# Altium PCB customteensypcbv2.0.PcbDoc
Units mil, origin at the board's own origin, x right, y up, seen from the top; angles counter-clockwise.
Board outline 1850.39 x 1889.76 mil, 2 copper layers (Top Layer, Bottom Layer); 31 components, 60 nets, 195 pads, 21 vias.
Unrouted connection lines stored in the file: 38.
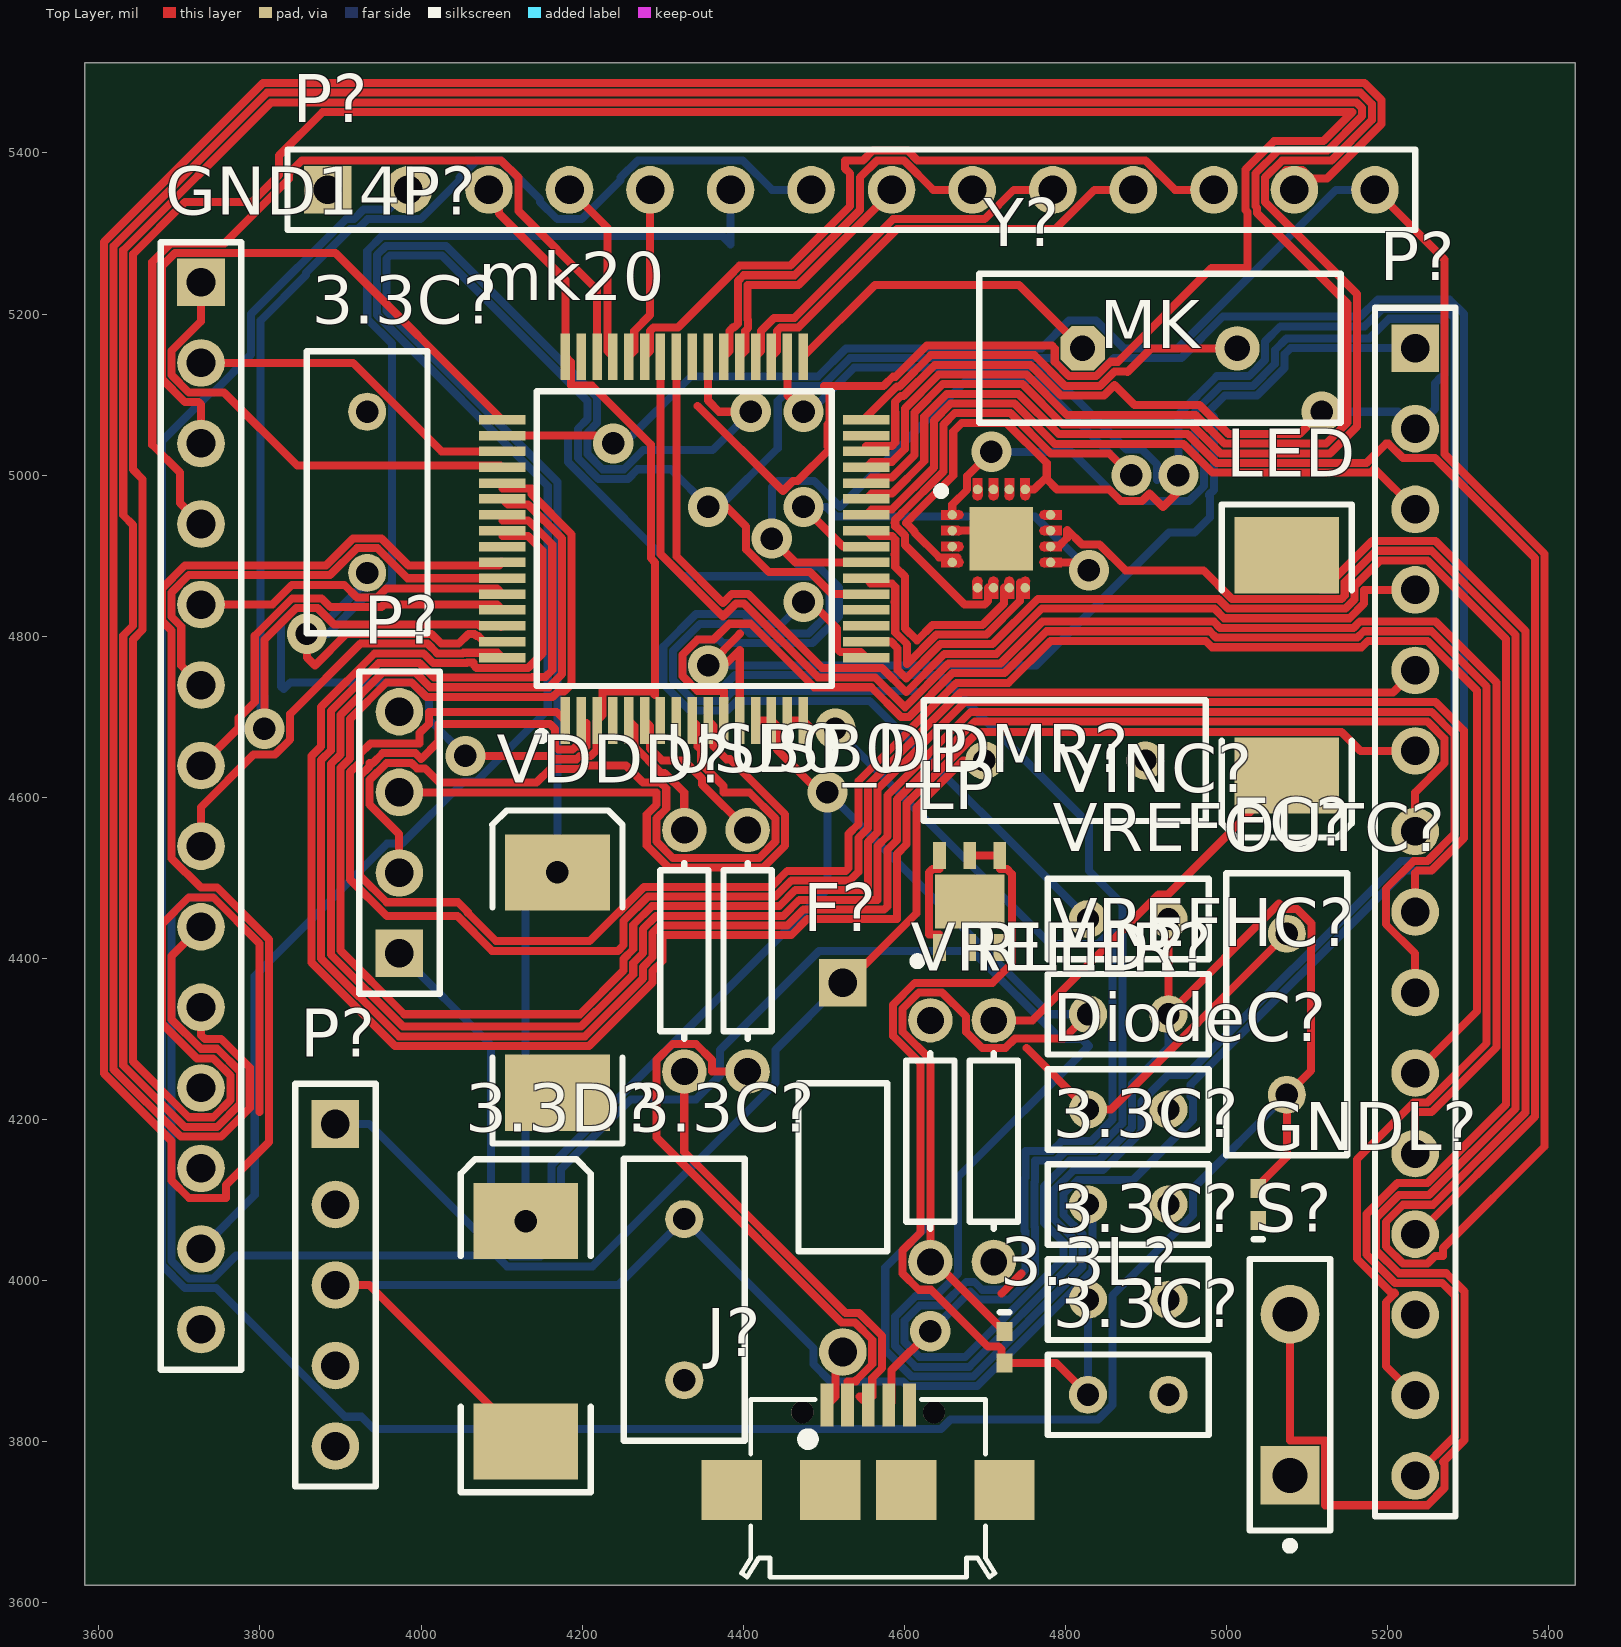
[diagram p0: Top Layer view]
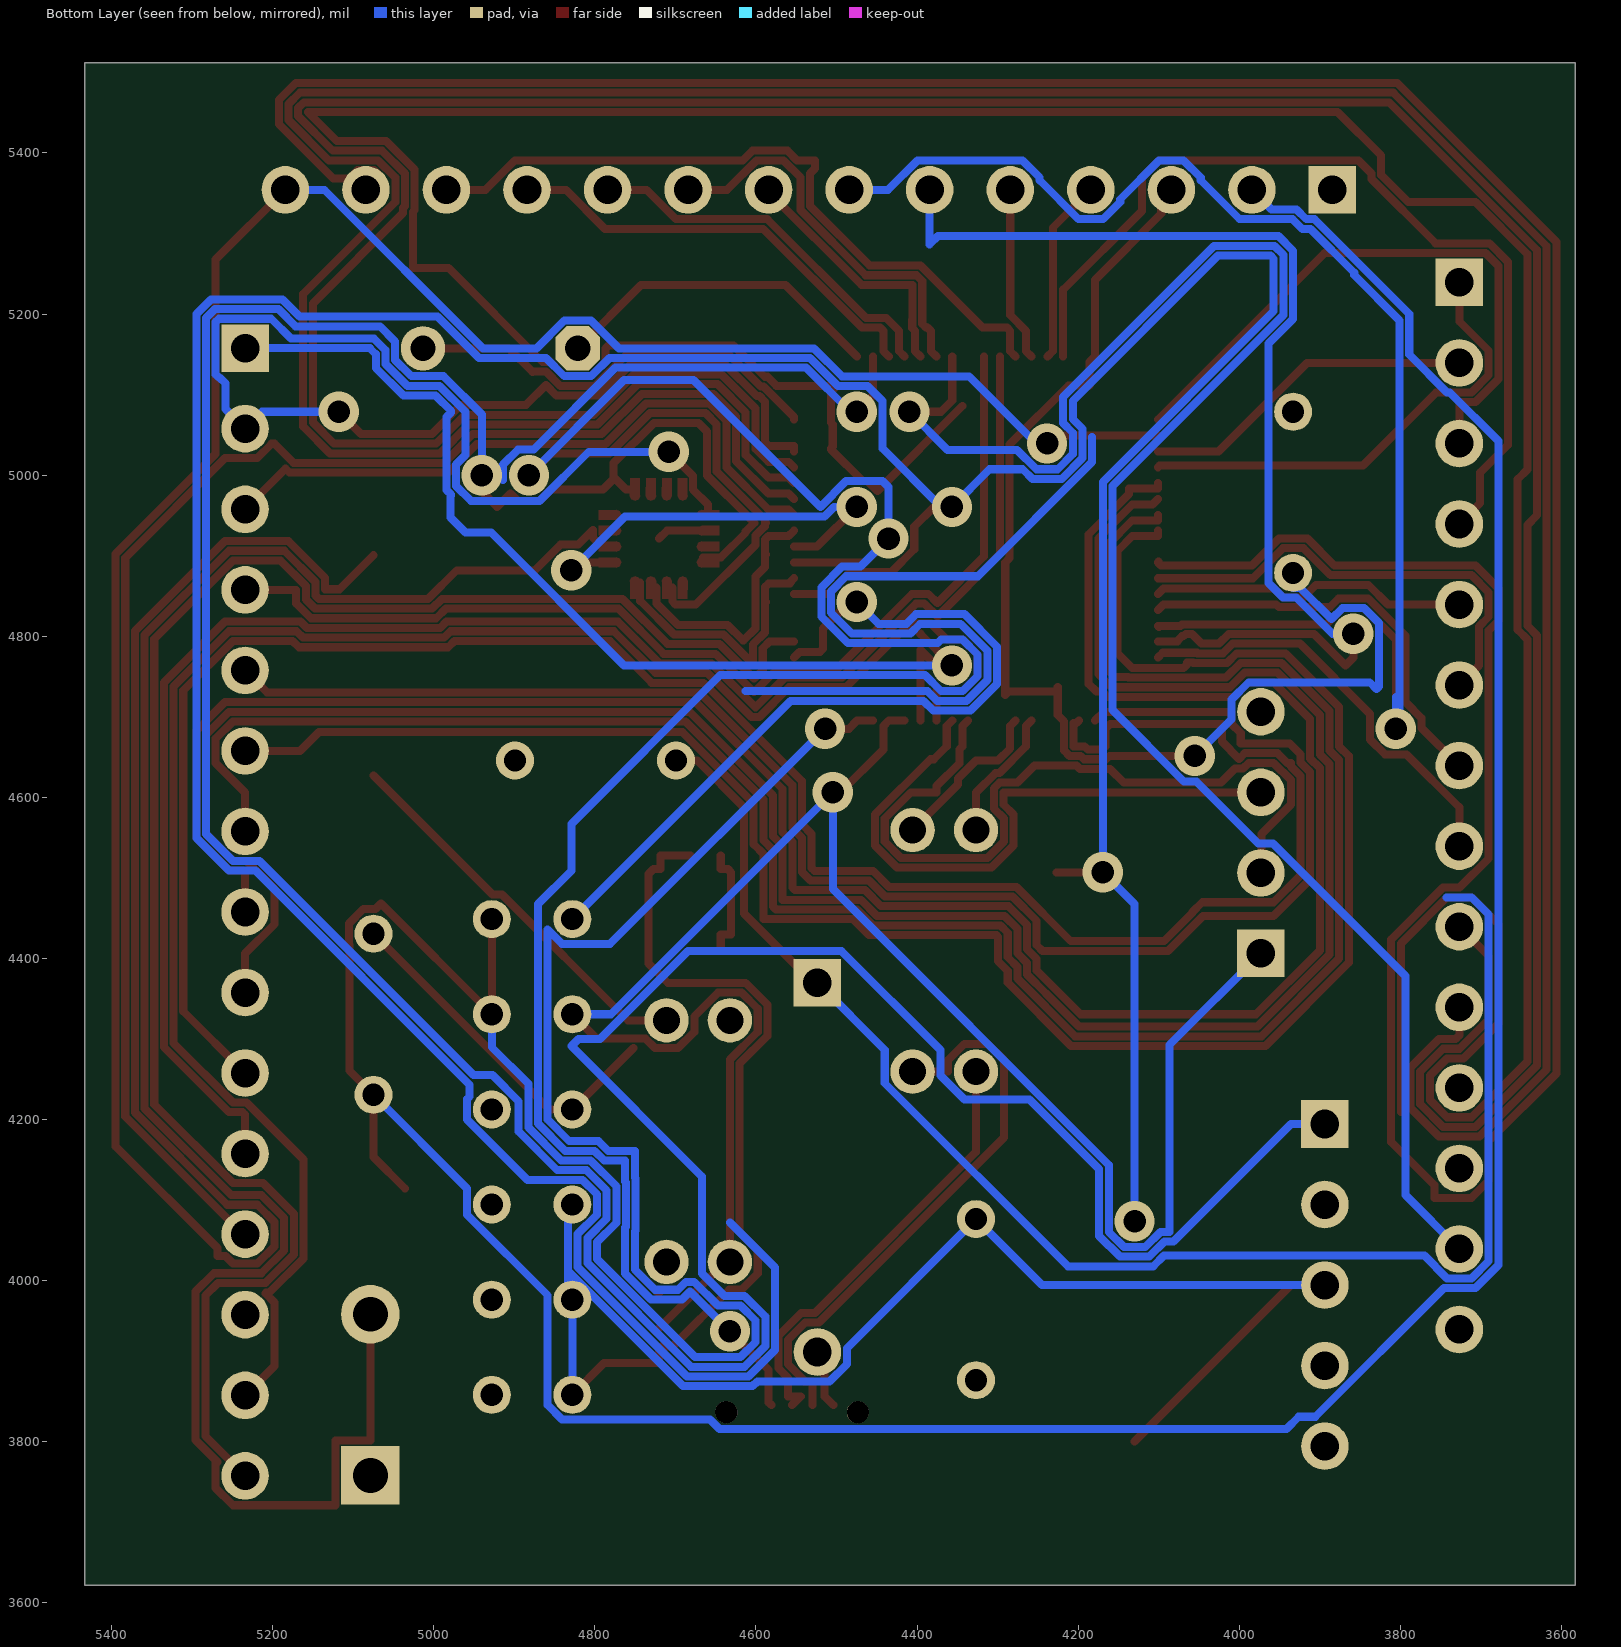
[diagram p1: Bottom Layer view, seen from below]

## Layer stack, top to bottom
Top Solder: solder mask 0.4, Solder Resist, Dk 3.5
Top Layer: signal copper 1.4
Dielectric 1: dielectric 12.6, FR-4, Dk 4.8
Bottom Layer: signal copper 1.4
Bottom Solder: solder mask 0.4, Solder Resist, Dk 3.5

## Board outline
3582.68,3622.05 3582.68,5511.81 5433.07,5511.81 5433.07,3622.05

## Design rules (kind name [scope] priority, off if disabled: settings)
Clearance [All] p1: gap=2 ignorepadtopadclearanceinfootprint=TRUE except(0: Arc-Hole Track-Hole SMDPad-Hole THPad-Hole Via-Hole Fill-Hole Poly-Hole Region-Hole Text-Hole)
PolygonConnect [All] p1: connectstyle=Relief reliefconductorwidth=10 reliefentries=4 polygonreliefangle="90 Angle" airgapwidth=10
RoomDefinition HeadersTeensy3.2 [InComponentClass('HeadersTeensy3.2')] p1: confinementstyle=ConfineIn formatcopy=TRUE lockcomponents=FALSE outline 3569.29,3622.05 5433.07,3622.05 5433.07,5511.81 3569.29,5511.81
RoutingVias [All] p1: holewidth=28 width=50 viastyle="Through Hole" minholewidth=28 minwidth=50 maxholewidth=28 maxwidth=50
SolderMaskExpansion [All] p1: expansion=4
Width [All] p1: maxlimit=10 minlimit=10 preferedwidth=10
30 further rules are at their usual default settings.

## Components (designator, comment, footprint, x,y, rotation, side; value= is the part's Value field where it differs from the comment)
3.3C? "Cap Pol1" RAD-0.2 3933.07,4978.74 r90 top value=2.2uF
3.3C? "Cap Pol1" RAD-0.1 4877.95,3976.38 r0 top value=0.1uF
3.3C? "Cap Pol1" RAD-0.1 4877.95,4094.49 r0 top value=0.1uF
3.3C? "Cap Pol1" RAD-0.2 4326.77,3976.38 r270 top value=2.2uF
3.3C? "Cap Pol1" RAD-0.1 4877.95,3858.27 r0 top value=0.1uF
3.3D? "Diode" SMC 4129.92,3937.01 r90 top
3.3L? "Ferrite Inductor" 0402-A 4724.41,3917.32 r270 top value=10mH
DiodeC? "Cap Pol1" RAD-0.1 4877.95,4212.6 r0 top value=0.1uF
F? "Fuse 2" PIN-W2/E2.8 4523.62,4140.75 r270 top
FC? "Cap Pol1" RAD-0.2 5074.8,4330.71 r270 top value=2.2uF
GND14P? "Header 14" HDR1X14 3726.77,5239.37 r270 top
GNDL? "Ferrite Inductor" 0402-A 5039.37,4094.49 r90 top value=10mH
J? "Micro-B" 629105136821 4555.12,3748.03 r0 top
LED "Diode" SMC 5074.8,4763.78 r270 top
LP "LP38691SD-ADJ" SON95P300X300X80-7N 4681.1,4470.47 r90 top
MK "MKL02Z32VFG4" QFN50P300X300X65-17N-D 4720.47,4921.26 r0 top
mk20 "mk20dx256vlh7" QFP50P1200X1200X160-64N 4326.77,4921.26 r90 top
P? "Header 15" HDR1X15 5234.24,5157.68 r270 top
P? "Header 5" HDR1X5 3893.7,4194.49 r270 top
P? "Header 14" HDR1X14 3884.25,5354.33 r0 top
P? "Header 4" HDR1X4 3973.04,4406.3 r90 top
RLED? "470" AXIAL-0.3 4711.02,4173.23 r90 top
S? "SW-PB" SPST-2 5078.74,3858.27 r90 top
USB0_DMR? "33" AXIAL-0.3 4405.51,4409.45 r90 top
USB0_DP "33" AXIAL-0.3 4326.77,4409.45 r90 top
VDDD? "Diode" SMC 4169.29,4370.08 r90 top
VINC? "Cap Pol1" RAD-0.2 4799.21,4645.67 r0 top value=2.2uF
VREFHC? "Cap Pol1" RAD-0.1 4877.95,4330.71 r0 top value=0.1uF
VREFHR? "470" AXIAL-0.3 4632.28,4173.23 r270 top
VREFOUTC? "Cap Pol1" RAD-0.1 4877.95,4448.82 r0 top value=0.1uF
Y? "ECS-10-13-1" HC-49U 4917.32,5157.48 r0 top

## Footprints (in the part's own frame and the unit in brackets; to place one, negate y for a bottom-side part, rotate by r counter-clockwise, add the part's x,y. Pads: shape width x height; smd on the part's side, far side on the other; paste and mask are expansions set on the pad)
0402-A [mm] "Chip Inductor, Body 1.0x0.5mm, IPC High Density"
  rect 0.6x0.5 smd: 1(-0.5,0) 2(0.5,0)
  silkscreen extent -1.1,-0.15 -1.1,0.15, body extent -0.55,-0.3 0.55,0.3, height 0.55
629105136821 [mm] "Micro USB 2.0 SMT Type B Horizontal 5 Contacts"
  rect 0.4x1.35 smd: 1(-1.3,2.475) 2(-0.65,2.475) 3(0,2.475) 4(0.65,2.475) 5(1.3,2.475)
  rect 1.9x1.9 smd: Shell(-4.3,-0.2) Shell(-1.2,-0.2) Shell(1.2,-0.2) Shell(4.3,-0.2)
  round 0.7 hole 0.7 unplated: ""(-2.075,2.25) ""(2.075,2.25)
  silkscreen extent -4,-2.95 4,2.65, body extent -4,-2.95 4,2.97, height 2.75
AXIAL-0.3 [mm] "Axial Device, Thru-Hole; 2 Leads; 0.3 in Pin Spacing"
  round 1.4 hole 0.85: 1(-3.81,0) 2(3.81,0)
  silkscreen extent -2.77,-0.76 2.77,0.76
HC-49U [mm] "Quartz Crystal, Thru-Hole; 2 Leads; Body 11.35 x 4.65 x 13.46 mm (LxWxH max)"
  oct 1.4x1.4 hole 0.8: 1(-2.44,0)
  round 1.4 hole 0.8: 2(2.44,0)
  silkscreen extent -5.7,-2.35 5.7,2.35
HDR1X4 [mm] "Connector; Header; 4 Position"
  rect 1.5x1.5 hole 0.9: 1(0,0)
  round 1.5 hole 0.9: 2(2.54,0) 3(5.08,0) 4(7.62,0)
  silkscreen extent -1.27,-1.27 8.89,1.27
HDR1X5 [mm] "Connector; Header; 5 Position"
  rect 1.5x1.5 hole 0.9: 1(0,0)
  round 1.5 hole 0.9: 2(2.54,0) 3(5.08,0) 4(7.62,0) 5(10.16,0)
  silkscreen extent -1.27,-1.27 11.43,1.27
HDR1X14 [mm] "Connector; Header; 14 Position"
  rect 1.5x1.5 hole 0.9: 1(0,0)
  round 1.5 hole 0.9: 2(2.54,0) 3(5.08,0) 4(7.62,0) 5(10.16,0) 6(12.7,0) 7(15.24,0) 8(17.78,0) 9(20.32,0) 10(22.86,0) 11(25.4,0) 12(27.94,0) 13(30.48,0) 14(33.02,0)
  silkscreen extent -1.27,-1.27 34.29,1.27
HDR1X15 [mm] "Connector; Header; 15 Position"
  rect 1.5x1.5 hole 0.9: 1(0,0)
  round 1.5 hole 0.9: 2(2.54,0) 3(5.08,0) 4(7.62,0) 5(10.16,0) 6(12.7,0) 7(15.24,0) 8(17.78,0) 9(20.32,0) 10(22.86,0) 11(25.4,0) 12(27.94,0) 13(30.48,0) 14(33.02,0) 15(35.56,0)
  silkscreen extent -1.27,-1.27 36.83,1.27
PIN-W2/E2.8 [mm] "Thru-Hole; 2 Leads"
  rect 1.5x1.5 hole 0.9: 1(-5.825,0)
  round 1.5 hole 0.9: 2(5.825,0)
  silkscreen extent -2.65,-1.4 2.65,1.4
QFN50P300X300X65-17N-D [mm]
  round 0.3 smd: 1(-1.55,0.75) 2(-1.55,0.25) 3(-1.55,-0.25) 4(-1.55,-0.75) 5(-0.75,-1.55) 6(-0.25,-1.55) 7(0.25,-1.55) 8(0.75,-1.55) 9(1.55,-0.75) 10(1.55,-0.25) 11(1.55,0.25) 12(1.55,0.75) 13(0.75,1.55) 14(0.25,1.55) 15(-0.25,1.55) 16(-0.75,1.55)
  rrect0% 2x2 smd: 17(0,0)
  Top Layer region: -1.9,0.9 -1.35,0.912 -1.235,0.865 -1.188,0.75 -1.235,0.635 -1.35,0.588 -1.35,0.6 -1.9,0.6 -1.9,0.9
  Top Layer region: -1.9,0.4 -1.35,0.412 -1.235,0.365 -1.188,0.25 -1.235,0.135 -1.35,0.088 -1.35,0.1 -1.9,0.1 -1.9,0.4
  Top Layer region: -1.9,-0.1 -1.35,-0.088 -1.235,-0.135 -1.188,-0.25 -1.235,-0.365 -1.35,-0.412 -1.35,-0.4 -1.9,-0.4 -1.9,-0.1
  Top Layer region: -1.9,-0.6 -1.35,-0.588 -1.235,-0.635 -1.188,-0.75 -1.235,-0.865 -1.35,-0.912 -1.35,-0.9 -1.9,-0.9 -1.9,-0.6
  Top Layer region: -0.9,-1.9 -0.912,-1.35 -0.865,-1.235 -0.75,-1.188 -0.635,-1.235 -0.588,-1.35 -0.6,-1.35 -0.6,-1.9 -0.9,-1.9
  Top Layer region: -0.4,-1.9 -0.412,-1.35 -0.365,-1.235 -0.25,-1.188 -0.135,-1.235 -0.088,-1.35 -0.1,-1.35 -0.1,-1.9 -0.4,-1.9
  Top Layer region: 0.1,-1.9 0.088,-1.35 0.135,-1.235 0.25,-1.188 0.365,-1.235 0.412,-1.35 0.4,-1.35 0.4,-1.9 0.1,-1.9
  Top Layer region: 0.6,-1.9 0.588,-1.35 0.635,-1.235 0.75,-1.188 0.865,-1.235 0.912,-1.35 0.9,-1.35 0.9,-1.9 0.6,-1.9
  Top Layer region: 1.9,-0.9 1.35,-0.912 1.235,-0.865 1.188,-0.75 1.235,-0.635 1.35,-0.588 1.35,-0.6 1.9,-0.6 1.9,-0.9
  Top Layer region: 1.9,-0.4 1.35,-0.412 1.235,-0.365 1.188,-0.25 1.235,-0.135 1.35,-0.088 1.35,-0.1 1.9,-0.1 1.9,-0.4
  Top Layer region: 1.9,0.1 1.35,0.088 1.235,0.135 1.188,0.25 1.235,0.365 1.35,0.412 1.35,0.4 1.9,0.4 1.9,0.1
  Top Layer region: 1.9,0.6 1.35,0.588 1.235,0.635 1.188,0.75 1.235,0.865 1.35,0.912 1.35,0.9 1.9,0.9 1.9,0.6
  Top Layer region: 0.9,1.9 0.912,1.35 0.865,1.235 0.75,1.188 0.635,1.235 0.588,1.35 0.6,1.35 0.6,1.9 0.9,1.9
  Top Layer region: 0.4,1.9 0.412,1.35 0.365,1.235 0.25,1.188 0.135,1.235 0.088,1.35 0.1,1.35 0.1,1.9 0.4,1.9
  Top Layer region: -0.1,1.9 -0.088,1.35 -0.135,1.235 -0.25,1.188 -0.365,1.235 -0.412,1.35 -0.4,1.35 -0.4,1.9 -0.1,1.9
  Top Layer region: -0.6,1.9 -0.588,1.35 -0.635,1.235 -0.75,1.188 -0.865,1.235 -0.912,1.35 -0.9,1.35 -0.9,1.9 -0.6,1.9
  silkscreen extent -2.02,1.38 -1.77,1.62
QFP50P1200X1200X160-64N [mm]
  rect 1.475x0.3 smd: 1(-5.738,3.75) 2(-5.738,3.25) 3(-5.738,2.75) 4(-5.738,2.25) 5(-5.738,1.75) 6(-5.738,1.25) 7(-5.738,0.75) 8(-5.738,0.25) 9(-5.738,-0.25) 10(-5.738,-0.75) 11(-5.738,-1.25) 12(-5.738,-1.75) 13(-5.738,-2.25) 14(-5.738,-2.75) 15(-5.738,-3.25) 16(-5.738,-3.75) 33(5.738,-3.75) 34(5.738,-3.25) 35(5.738,-2.75) 36(5.738,-2.25) 37(5.738,-1.75) 38(5.738,-1.25) 39(5.738,-0.75) 40(5.738,-0.25) 41(5.738,0.25) 42(5.738,0.75) 43(5.738,1.25) 44(5.738,1.75) 45(5.738,2.25) 46(5.738,2.75) 47(5.738,3.25) 48(5.738,3.75)
  rect 0.3x1.475 smd: 17(-3.75,-5.738) 18(-3.25,-5.738) 19(-2.75,-5.738) 20(-2.25,-5.738) 21(-1.75,-5.738) 22(-1.25,-5.738) 23(-0.75,-5.738) 24(-0.25,-5.738) 25(0.25,-5.738) 26(0.75,-5.738) 27(1.25,-5.738) 28(1.75,-5.738) 29(2.25,-5.738) 30(2.75,-5.738) 31(3.25,-5.738) 32(3.75,-5.738) 49(3.75,5.738) 50(3.25,5.738) 51(2.75,5.738) 52(2.25,5.738) 53(1.75,5.738) 54(1.25,5.738) 55(0.75,5.738) 56(0.25,5.738) 57(-0.25,5.738) 58(-0.75,5.738) 59(-1.25,5.738) 60(-1.75,5.738) 61(-2.25,5.738) 62(-2.75,5.738) 63(-3.25,5.738) 64(-3.75,5.738)
  silkscreen extent -6.35,-4.65 4.65,4.65
RAD-0.1 [mm] "Radial Cap, Thru-Hole; 2 Leads; 0.1 in Pin Spacing"
  round 1.2 hole 0.7: 1(-1.27,0) 2(1.27,0)
  silkscreen extent -2.54,-1.27 2.54,1.27
RAD-0.2 [mm] "Radial Cap, Thru-Hole; 2 Leads; 0.2 in Pin Spacing"
  round 1.2 hole 0.7: 1(-2.54,0) 2(2.54,0)
  silkscreen extent -4.44,-1.91 4.44,1.91
SMC [mm] "DO-214-AB/SMC; 2 C-Bend Leads; Body 7.9 x 5.9 mm, inc. leads (LxW)"
  rect 2.4x3.3 smd: 1(-3.475,0) 2(3.475,0)
  silkscreen extent -5.07,-2.05 5.43,2.05
SON95P300X300X80-7N [mm]
  rect 0.85x0.4 smd: 1(-1.45,0.95) 2(-1.45,0) 3(-1.45,-0.95) 4(1.45,-0.95) 5(1.45,0) 6(1.45,0.95)
  rect 1.7x2.2 smd: 7(0,0)
  silkscreen extent -2,1.52 -1.75,1.77
SPST-2 [mm] "Switch; 2 Leads"
  rect 1.85x1.85 hole 1.1: 1(-2.54,0)
  round 1.85 hole 1.1: 2(2.54,0)
  silkscreen extent -4.89,-1.27 4.28,1.27

## Part data
3.3C? 3.3C? 3.3C? 3.3C? 3.3C? DiodeC? FC? VINC? VREFHC? VREFOUTC?: "Polarized Capacitor (Radial)", LatestRevisionDate=17-Jul-2002, LatestRevisionNote="Re-released for DXP Platform.", PackageDescription="Polarized Capacitor (Radial); 2 Leads", PackageReference=RB7.6-15, Published=8-Jun-2000, Publisher="Altium Limited"
3.3D? LED VDDD?: "Default Diode", Code_JEDEC=DO-214-AB, LatestRevisionDate=17-Jul-2002, LatestRevisionNote="Re-released for DXP Platform.", PackageDescription="DO-214-AB/SMC; 2 C-Bend Leads; Body 7.9 x 5.9 mm, inc. leads (LxW)", PackageReference=SMC, PackageVersion=Sep-1996, Published=8-Jun-2000, Publisher="Altium Limited"
3.3L? GNDL?: library part Inductor, "Inductor", Code_IEC=1005, Code_JEITA=0402, LatestRevisionDate=29-May-2009, LatestRevisionNote="IPC-7351 Footprint Added.", PackageDescription="Chip Inductor", PackageReference=0402-A, Published=8-Jun-2000, Publisher="Altium Limited"
F?: "Fuse", LatestRevisionDate=17-Jul-2002, LatestRevisionNote="Re-released for DXP Platform.", PackageDescription="Thru-Hole; 2 Leads", PackageReference=PIN-W2/E2.8, Published=8-Jun-2000, Publisher="Altium Limited"
GND14P? P?: "Header, 14-Pin", LatestRevisionDate=17-Jul-2002, LatestRevisionNote="Re-released for DXP Platform.", Publisher="Altium Limited"
J?: library part 629105136821, "Micro USB 2.0 SMT Type B Horizontal 5 Contacts WR-COM", ComponentLink1Description=Manufacturer, ComponentLink1URL=http://www.we-online.de, ComponentLink2Description=Datasheet, ComponentLink2URL=http://katalog.we-online.de/em/datasheet/629105136821.pdf, Construction=SMT, Gender=Receptacle, Interface Type="Type B", Part Number=629105136821, Published Date="April 2017", Publisher="Wurth Elektronik", Sub-Family="Micro USB 2.0", Type=Horizontal
LP: "500mA LDO Regulator Adj.,LP38691SD-ADJ", Manufacturer_Name="Texas Instruments", Mouser Part Number=926-LP38691SD-ADJ, Datasheet Link=http://www.ti.com/lit/ds/symlink/lp38691-adj.pdf, Geometry.Height=0.8mm, Manufacturer_Part_Number=LP38691SD-ADJ, Supplier_Name=Mouser
MK: "Freescale MKL02Z32VFG4, 32bit ARM Cortex M0 Microcontroller, 48MHz, 32 kB Flash, 16-Pin QFN", Manufacturer_Name=Nexperia, RS Part Number=7884723, Datasheet Link=http://cache.nxp.com/files/32bit/doc/data_sheet/KL02P32M48SF0.pdf, Geometry.Height=0.65mm, Manufacturer_Part_Number=MKL02Z32VFG4, Supplier_Name=RS
mk20: "MK20DX256VLH7, ARM Cortex M4 MCU 72MHz 256 kB Flash, 64 kB RAM, USB CAN I2C 64-Pin LQFP", Manufacturer_Name=Nexperia, RS Part Number=7862120P, Datasheet Link=https://www.pjrc.com/teensy/K20P64M72SF1.pdf, Geometry.Height=1.6mm, Manufacturer_Part_Number=mk20dx256vlh7, Supplier_Name=RS
P?: "Header, 15-Pin", LatestRevisionDate=17-Jul-2002, LatestRevisionNote="Re-released for DXP Platform.", Publisher="Altium Limited"
P?: "Header, 5-Pin", LatestRevisionDate=17-Jul-2002, LatestRevisionNote="Re-released for DXP Platform.", Publisher="Altium Limited"
P?: "Header, 4-Pin", LatestRevisionDate=17-Jul-2002, LatestRevisionNote="Re-released for DXP Platform.", Publisher="Altium Limited"
RLED? USB0_DMR? USB0_DP VREFHR?: library part Res1, "Resistor", LatestRevisionDate=17-Jul-2002, LatestRevisionNote="Re-released for DXP Platform.", PackageDescription="Axial Device, Thru-Hole; 2 Leads; 0.3 in Pin Spacing", PackageReference=AXIAL-0.3, Published=8-Jun-2000, Publisher="Altium Limited"
S?: "Switch", LatestRevisionDate=17-Jul-2002, LatestRevisionNote="Re-released for DXP Platform.", PackageDescription="Switch; 2 Leads", PackageReference=SPST-2, Published=24-Mar-1999, Publisher="Altium Limited"
Y?: "Crystal Oscillator", ComponentLink1Description="Manufacturer Link", ComponentLink1URL=http://www.ecsxtal.com/, ComponentLink2Description=Datasheet, ComponentLink2URL=http://www.ecsxtal.com/pdf2/HC49U.PDF, DatasheetDocument=18-Apr-2000, PackageReference=HC-49U, Published=17-Jul-2002, Publisher="Altium Limited"

## Via types
v1: diameter 50, hole 28, Top Layer to Bottom Layer, 21 vias

## Nets (pads, with @x,y where several pads share a name; then routed paths per layer and width w, separated by ;. In a path a pad name is that pad's centre, name@x,y a point inside that pad or via, vN(x,y) a via of type N, cw(c..) or ccw(c..) an arc to the next point about the centre after c; other vN are vias at no path point)
GND: 3.3C?.2 DiodeC?.2 GND14P?.14 GNDL?.1 J?.5 J?.Shell LP.2 LP.7 mk20.4 mk20.31 mk20.47 P?.4@3893.7,3894.49 P?.13@5234.24,3957.68 RLED?.1 S?.1 VINC?.2
Net3.3C?_1: 3.3C?.1 3.3D?.1 3.3L?.2 LP.4 LP.5 mk20.3 mk20.7 mk20.30 mk20.48 MK.1 P?.2@5234.24,5057.68 P?.3@3893.7,3994.49 P?.3@4084.25,5354.33 | length 6121.3
  Top Layer w10: P?.3@3893.7,3994.49 3935.63,3994.49 3.3D?.1 ; v1(4055.12,4651.42) 4161.26,4651.42 4165.36,4647.32 4192.91,4647.32 4197.01,4651.42 4210.57,4651.42 4217.6,4658.45 4217.6,4694.45 mk20.3 4225.28,4702.13 4225.28,4731.39 ; P?.3@4084.25,5354.33 4096.78,5341.8 4096.78,5324.83 4179.13,5242.48 mk20.48 4185.91,5140.39 4185.91,5111.13 4212.08,5111.13 4285.24,5037.96 4285.24,4897 4290.46,4891.78 4290.46,4727.29 4286.36,4731.39 4225.28,4731.39 ; 4225.28,4737.09 4225.28,4731.39 ; mk20.30 4552.68,5036.31 4584.61,5036.31 4588.71,5040.41 4588.71,5077.7 4588.55,5077.86 4588.55,5091.16 4595.58,5098.19 4598.94,5098.19 4637.75,5137 4756.57,5137 4794.64,5098.92 4847.88,5098.92 4860.79,5111.83 4885.7,5086.92 4966.49,5086.92 5002.35,5051.06 5090.43,5051.06 v1(5118.11,5078.74) ; MK.1 4659.45,4963.4 4678.04,4981.99 4678.04,4998.96 v1(4708.12,5029.04) ; LP.5 LP.4 4718.5,4510.94 4727.31,4510.94 4733.38,4504.87 4733.38,4393.75 4709.41,4369.79 4613,4369.79 4585.72,4342.51 4585.72,4303.94 4620.28,4269.38 4620.28,4060.1 4597.72,4037.54 4597.72,4008.91 4617.97,3988.67 4633.16,3988.67 4703.63,3918.2 4717.07,3918.2 4720.47,3914.8 4720.47,3897.64 4788.58,3897.64 3.3C?.1@4827.95,3858.27
  Bottom Layer w10: P?.3@3893.7,3994.49 4244.88,3994.49 4326.77,4076.38 4487.09,3916.06 4487.09,3896.29 4508.49,3874.89 4598.24,3874.89 4604.12,3869.01 4690.53,3869.01 4833.33,4011.81 ; 3.3C?.1@3933.07,4878.74 3933.07,4860.12 3924.25,4860.12 3885.4,4821.27 3871.52,4835.15 3845.01,4835.15 3826.27,4816.41 3826.27,4737.59 3829.51,4734.35 3837.99,4742.83 3988.17,4742.83 4009.57,4721.43 4009.57,4696.97 v1(4055.12,4651.42) ; v1(4708.12,5029.04) 4807.6,5029.04 4868.64,4968 4895.14,4968 4953.53,4968 4972.27,4986.75 4972.27,5013.26 4960.63,5024.9 4960.63,5078.74 4992.81,5110.92 5032.67,5110.92 5059.94,5138.19 5059.94,5155.17 5074.46,5169.68 5177.29,5169.68 5201.81,5194.2 5266.67,5194.2 5270.77,5190.1 5270.77,5125.25 5266.67,5121.15 5265.8,5121.15 5258.77,5114.12 5258.77,5082.2 5234.24,5057.68 5213.18,5078.74 v1(5118.11,5078.74) ; 3.3C?.1@4827.95,3858.27 4827.95,3976.38 4833.33,3981.76 4833.33,4089.11 4827.95,4094.49 4823.27,4089.81 3.3C?.1@4833.33,4079.75
Net3.3D?_2: 3.3D?.2 DiodeC?.1 mk20.21 VDDD?.2 | length 5756.3
  Top Layer w10: v1(4169.29,4506.89) VDDD?.2@4226.89,4506.89 ; v1(4356.69,4960.63) 4379.09,4960.63 4403.43,4936.29 4403.43,4908.01 4431.71,4879.73 4482.85,4879.73 4510.22,4852.36 mk20.21 ; 4720.47,3983.8 4745.58,4008.91 ; 4751.88,4288.67 DiodeC?.1 4856.69,4212.6 5074.8,4430.71
  Bottom Layer w10: v1(4129.92,4073.82) 4129.92,4467.52 v1(4169.29,4506.89) 4169.29,4991.68 3957.17,5203.79 3957.17,5268.65 3961.27,5272.75 4026.13,5272.75 4206.58,5092.29 4206.58,5069.6 4194.58,5057.6 4194.58,5021.14 4220.36,4995.37 4256.81,4995.37 4268.81,5007.37 4309.95,5007.37 v1(4356.69,4960.63) 4370.08,4960.63 4442.8,5033.35 4442.8,5091.99 4461.55,5110.74 4498,5110.74 4532.74,5145.48 4782.02,5145.48 4804.58,5122.92 4837.94,5122.92 4860.5,5145.48 4944.03,5145.48 4995.4,5196.85 5166.49,5196.85 5187.85,5218.2 5276.61,5218.2 5294.77,5200.04 5294.77,4549.58 5254.34,4509.15 5221.4,4509.15 4955.47,4243.22 4955.47,4228.39 4958.57,4225.28 4958.57,4199.91 4883.77,4125.11 4815.27,4125.11 4797.33,4107.17 4797.33,4081.8 4821.33,4057.8 4821.33,4016.78 4685.56,3881.01 4609.09,3881.01 4576.28,3913.81 4576.28,4016.1 4632.28,4072.1
Net3.3L?_1: 3.3L?.1 FC?.1 mk20.10 mk20.13 mk20.14 P?.1@3973.04,4406.3 P?.3@3973.04,4606.3 VREFHC?.1 VREFHR?.1 VREFHR?.2 | length 3286.9
  Top Layer w10: P?.3@3973.04,4606.3 4292.4,4606.3 4292.4,4590.92 4280.21,4578.73 4280.21,4540.16 4307.49,4512.89 4424.8,4512.89 4452.07,4540.16 4452.07,4578.73 4383.49,4647.32 4379.18,4647.32 4363.08,4663.42 4363.08,4688.57 mk20.10 ; mk20.13 mk20.14 4441.82,4688.57 4441.82,4659.32 4494.84,4606.3 v1(4504.51,4606.3) ; 3.3L?.1 4638.19,4023.23 VREFHR?.2 4632.28,4274.35 4597.72,4308.91 4597.72,4337.54 4617.97,4357.79 4646.88,4357.79 4676.46,4328.2 4676.46,4308.91 4696.71,4288.67 4725.34,4288.67 4737.34,4300.67 4797.91,4300.67 VREFHC?.1
  Bottom Layer w10: P?.1@3973.04,4406.3 4086.55,4292.79 4086.55,4060.56 4097.92,4060.56 4116.67,4041.82 4143.18,4041.82 4161.92,4060.56 4161.92,4143.47 4504.51,4486.06 v1(4504.51,4606.3) 4780.1,4330.71 VREFHC?.1
NetF?_1: F?.1 J?.1 VINC?.1 | length 1888
  Top Layer w10: F?.1 4529.04,4370.08 4614.81,4455.85 4614.81,4587.6 4672.88,4645.67 VINC?.1
  Bottom Layer w10: 3742.64,4475.9 3711.64,4475.9 3690.24,4454.5 3690.24,4024.24 3711.64,4002.84 3741.9,4002.84 3770.08,4031.02 4093.53,4031.02 4106.73,4017.82 4212.76,4017.82 4440.07,4245.13 4440.07,4286.53 F?.1
NetF?_2: F?.2 LP.1 LP.6 P?.1@3884.25,5354.33 P?.4@3973.04,4706.3 | length 1170.7
  Top Layer w10: P?.1@3884.25,5345.67 P?.1@3884.25,5354.33 ; LP.1 4643.7,4430.01 4630.8,4430.01 4630.8,4506.84 4634.9,4510.94 4643.7,4510.94 LP.6
  Bottom Layer w10: 4182.58,5047.34 4182.58,5016.17 4324.24,4874.52 4488.06,4874.52 4506.8,4855.77 4506.8,4829.26 4481,4803.46 4408.06,4803.46 4396.06,4815.46 4346.15,4815.46 4312.7,4782.01 4312.7,4745.56 4338.47,4719.78 4374.92,4719.78 4386.92,4731.78 4613.1,4731.78
NetFC?_2: FC?.2 GNDL?.2 mk20.15 mk20.16 P?.2@3984.25,5354.33 VREFHC?.2 VREFOUTC?.2 | length 5873.4
  Top Layer w10: P?.2@3984.25,5354.33 P?.2@3996.8,5354.33 ; mk20.15 mk20.16 4484.72,4685.04 v1(4514.17,4685.04) ; VREFOUTC?.2 VREFHC?.2 5065.35,4468.11 5072.13,4461.33 5087.49,4461.33 5105.43,4443.39 5105.43,4417.32 5104.72,4416.62 5104.72,4260.63 FC?.2 5074.8,4153.54 GNDL?.2@5035.43,4114.17
  Bottom Layer w10: P?.2@3984.25,5354.33 3959.72,5329.8 3928.68,5329.8 3916.68,5317.8 3906.66,5317.8 3788.88,5200.03 3788.88,5149.82 3741.9,5102.84 3738.59,5102.84 3678.24,5042.5 3678.24,4019.27 3706.67,3990.84 3745.69,3990.84 3905.52,3831.02 3926.13,3831.02 3941.31,3815.83 4645.42,3815.83 4657.23,3827.65 4840.64,3827.65 4858.57,3845.58 4858.57,3981.8 4958.57,4081.8 4958.57,4114.48 FC?.2 ; v1(4514.17,4685.04) 4781.02,4418.2 4840.64,4418.2 4858.57,4436.13 4858.57,4199.91 4831.77,4173.11 4795.39,4173.11 4783.39,4161.11 4750.39,4161.11 4750.39,4128.12 4749.33,4127.05 4749.33,4061.92 4750.39,4060.86 4750.39,4013.72 4725.34,3988.67 4696.71,3988.67 4686.81,3998.57 4676.87,3998.57 4647.31,3969.01 4619.03,3969.01 4600.28,3950.26 4600.28,3923.75 4619.03,3905.01 4675.62,3905.01 4797.33,4026.72 4797.33,4047.86 4773.33,4071.86 4773.33,4117.11 4805.33,4149.11 4841.71,4149.11 4882.57,4189.97 4882.57,4244.47 4927.95,4289.85 VREFHC?.2
NetGND14P?_1: GND14P?.1 mk20.52 | length 588.3
  Top Layer w10: GND14P?.1 3726.77,5191.03 3690.24,5154.5 3690.24,5124.24 3711.64,5102.84 3755.43,5102.84 3846.27,5012 4098.71,5012 mk20.52
NetGND14P?_2: GND14P?.2 mk20.51 | length 419.6
  Top Layer w10: GND14P?.2 3915.75,5139.37 4025.59,5029.53 mk20.51
NetGND14P?_3: GND14P?.3 mk20.49 | length 765.5
  Top Layer w10: GND14P?.3 3726.77,5087.71 3723.64,5090.84 3706.67,5090.84 3678.24,5119.27 3678.24,5259.8 3694.34,5275.9 3893.87,5275.9 mk20.49
NetGND14P?_4: GND14P?.4 mk20.46 | length 1133.1
  Top Layer w10: GND14P?.4 3700.79,4965.35 3700.79,5003.15 3666.24,5037.7 3666.24,5264.77 3689.37,5287.9 3756.05,5287.9 3835.72,5367.57 3835.72,5374.76 3851.82,5390.86 4099.38,5390.86 4120.78,5369.46 4120.78,5328.04 4218.5,5230.31 mk20.46
NetGND14P?_5: GND14P?.5 mk20.60 | length 398.2
  Top Layer w10: GND14P?.5 3815.29,4839.37 3839.82,4863.9 3904.61,4863.9 3920.39,4848.12 3945.75,4848.12 3956.78,4859.14 4094.09,4859.14 mk20.60
NetGND14P?_6: GND14P?.6 mk20.59 | length 579.1
  Top Layer w10: GND14P?.6 3702.24,4763.9 3702.24,4812.24 3690.24,4824.24 3690.24,4854.5 3711.64,4875.9 3886.92,4875.9 3920.39,4909.36 3945.75,4909.36 3983.07,4872.05 mk20.59
NetGND14P?_7: GND14P?.7 mk20.61 | length 524.3
  Top Layer w10: GND14P?.7 3773.51,4686.11 3773.51,4698.29 3793.51,4718.29 3793.51,4800.62 3840.04,4847.15 3876.5,4847.15 3887.53,4836.12 3950.73,4836.12 3954.06,4839.46 4094.09,4839.46 mk20.61
NetGND14P?_8: GND14P?.8 mk20.64 | length 532.9
  Top Layer w10: GND14P?.8 3726.77,4587.71 3792.1,4653.04 3818.77,4653.04 3837.51,4671.78 3837.51,4703.65 3924.69,4790.83 4008.05,4790.83 4020.05,4778.83 4051.7,4778.83 4052.41,4779.53 4094.96,4779.53 mk20.64
NetGND14P?_9: GND14P?.9 mk20.29 | length 4359.5
  Top Layer w10: GND14P?.9 3690.24,4402.84 3690.24,4324.24 3726.59,4287.9 3746.87,4287.9 3775.3,4259.47 3775.3,4219.27 3746.87,4190.84 3706.67,4190.84 3630.24,4267.27 3630.24,4801.09 3642.24,4813.09 3642.24,4938.3 3630.24,4950.3 3630.24,5279.35 3813.75,5462.86 5161.32,5462.86 5168.35,5455.83 5168.35,5445.89 5125.32,5402.86 5064.15,5402.86 5035.72,5374.43 5035.72,5334.23 5037.98,5331.97 5037.98,5325.36 5150.11,5213.23 5150.11,5065.49 5123.69,5039.06 4997.38,5039.06 4961.52,5074.92 4801.67,5074.92 4751.6,5125 4642.72,5125 4600.71,5082.99 4600.71,5032.72 4584.61,5016.62 4559.46,5016.62 mk20.29
NetGND14P?_10: GND14P?.10 mk20.28 | length 4328.5
  Top Layer w10: GND14P?.10 3726.77,4304.68 3731.56,4299.9 3751.84,4299.9 3787.3,4264.44 3787.3,4214.3 3751.84,4178.84 3701.7,4178.84 3618.24,4262.3 3618.24,5284.32 3808.78,5474.86 5166.29,5474.86 5180.35,5460.8 5180.35,5440.92 5130.29,5390.86 5069.12,5390.86 5047.72,5369.46 5047.72,5339.2 5162.11,5224.81 5162.11,5060.51 5128.66,5027.06 4992.41,5027.06 4956.55,5062.92 4796.7,5062.92 4746.63,5113 4647.69,5113 4612.71,5078.02 4612.71,5025.04 4584.61,4996.94 4559.46,4996.94 mk20.28
NetGND14P?_11: GND14P?.11 mk20.57
NetGND14P?_12: GND14P?.12 mk20.40
NetGND14P?_13: GND14P?.13 mk20.39 | length 2305.8
  Top Layer w10: mk20.39 4356.3,5092.52 4370.08,5078.74 v1(4409.45,5078.74)
  Bottom Layer w10: GND14P?.13 3793.51,4106.11 3793.51,4378.43 3957.91,4542.83 3976.38,4542.83 4052.97,4619.42 4068.37,4619.42 4157.29,4708.34 4157.29,4986.7 3945.17,5198.82 3945.17,5273.62 3956.3,5284.75 4031.1,5284.75 4218.58,5097.26 4218.58,5064.62 4206.58,5052.62 4206.58,5026.12 4225.33,5007.37 4251.84,5007.37 4275.84,5031.37 4362.08,5031.37 v1(4409.45,5078.74)
NetJ?_2: J?.2 USB0_DMR?.1 | length 712.6
  Top Layer w10: USB0_DMR?.1 4361.33,4259.45 4361.33,4273.76 4341.09,4294.01 4312.46,4294.01 4292.21,4273.76 4292.21,4177.51 4521.78,3947.94 4538.75,3947.94 4560.15,3926.55 4560.15,3896.29 4540.24,3876.38 4540.24,3874.89 4529.53,3874.89 J?.2
NetJ?_3: J?.3 USB0_DP.1 | length 550.7
  Top Layer w10: USB0_DP.1 4326.77,4159.93 4526.75,3959.94 4543.72,3959.94 4572.15,3931.52 4572.15,3891.32 4560.15,3879.32 4560.15,3856.19 4544.4,3856.19 J?.3
NetJ?_4: J?.4 mk20.23 MK.6 | length 3304.8
  Top Layer w10: v1(4435.43,4921.26) 4464.96,4891.73 mk20.23 ; J?.4 4584.15,3848.91 4584.15,3888.87 v1(4632.28,3937.01) ; MK.6 4703.85,4860.24 4703.85,4843.56 4699.75,4839.46 4674.72,4839.46 4600.71,4913.46 4600.71,4925.19 4589.58,4936.32 4588.71,4936.32 4588.71,4939.91 4587.68,4940.94 4588.71,4941.98 4588.71,4944.7 4589.58,4945.57 4589.69,4945.57 4596.72,4952.6 4596.72,4952.71 4648.71,5004.7 4648.71,5063.11 4662.6,5077 4731.71,5077 4781.79,5026.92 4854.48,5026.92 v1@4881.4,5000
  Bottom Layer w10: v1(4632.28,3937.01) 4681.84,3986.57 4691.74,3976.67 4730.31,3976.67 4762.39,4008.75 4762.39,4065.83 4761.33,4066.89 4761.33,4122.08 4762.39,4123.15 4762.39,4149.11 4788.36,4149.11 4800.36,4161.11 4836.74,4161.11 4870.57,4194.94 4870.57,4467.44 4829.13,4508.88 4829.13,4566.93 4644.28,4751.78 4389.95,4751.78 4369.95,4731.78 4343.44,4731.78 4324.7,4750.53 4324.7,4777.04 4343.44,4795.78 4369.95,4795.78 4374.27,4791.46 4485.97,4791.46 4518.8,4824.29 4518.8,4860.74 4493.03,4886.52 4470.17,4886.52 v1(4435.43,4921.26) 4435.43,4985.26 4442.8,4992.63 4488.06,4992.63 4520.06,4960.63 4677.54,5118.11 4763.78,5118.11 v1(4881.89,5000)
NetLED_1: LED.1 mk20.50 P?.14@5184.25,5354.33 | length 4044.3
  Top Layer w10: mk20.50 4228.74,5049.21 v1(4238.58,5039.37) ; LED.1 5117.05,4858.35 5134.76,4858.35 5134.76,4872.39 5180.58,4918.2 5259.31,4918.2 5371.02,4806.49 5371.02,4208.86 5256.37,4094.2 5219.11,4094.2 5197.71,4072.81 5197.71,4042.55 5219.11,4021.15 5249.37,4021.15 5258.61,4030.39 5268.55,4030.39 5268.55,4040.33 5395.02,4166.8 5395.02,4902.09 5270.77,5026.34 5270.77,5267.81 P?.14@5184.25,5354.33
  Bottom Layer w10: v1(4238.58,5039.37) 4251.97,5039.37 4335.34,5122.74 4493.03,5122.74 4527.77,5157.48 4770.02,5157.48 4804.58,5192.04 4837.94,5192.04 4872.5,5157.48 4939.06,5157.48 5135.91,5354.33 P?.14@5184.25,5354.33
NetLED_2: LED.2 RLED?.2 | length 489.6
  Top Layer w10: RLED?.2 4759.06,4323.23 4915.27,4479.44 4927.28,4479.44 LED.2
Netmk20_1: mk20.1 P?.5@5234.24,4757.68 | length 2035.3
  Top Layer w10: mk20.1 4168.26,4706.23 4009.57,4706.23 4009.57,4691.17 3998.11,4679.71 3998.11,4666.83 3937.26,4666.83 3923.91,4653.48 3923.91,4643.37 3911.91,4631.37 3911.91,4498.2 3957.47,4452.65 4045.09,4452.65 4088.29,4409.45 4244.37,4409.45 4251.4,4416.48 4251.4,4446.76 4281.53,4476.89 4439.71,4476.89 4459.64,4496.82 4532.25,4496.82 4542.81,4507.38 4542.81,4549.64 4554.81,4561.64 4554.81,4615.09 4669.93,4730.2 5206.77,4730.2 P?.5@5234.24,4757.68
Netmk20_2: mk20.2 P?.10@5234.24,4257.68 | length 2688.2
  Top Layer w10: mk20.2 4201.79,4692.38 4205.6,4692.38 4205.6,4663.42 4192.04,4663.42 4187.94,4659.32 4170.33,4659.32 4166.23,4663.42 4166.23,4685.04 4160.1,4691.17 4021.57,4691.17 4021.57,4669.23 4000.15,4647.81 3993.14,4654.83 3952.34,4654.83 3940.34,4642.83 3935.91,4642.83 3935.91,4638.4 3923.91,4626.4 3923.91,4503.17 3957.31,4469.77 4045.81,4469.77 4057.96,4457.62 4057.96,4456.75 4093.26,4421.45 4209.12,4421.45 4276.56,4488.89 4434.74,4488.89 4454.67,4508.82 4527.28,4508.82 4530.81,4512.35 4530.81,4554.61 4542.81,4566.61 4542.81,4620.06 4664.96,4742.2 4729.43,4742.2 4781.43,4794.2 4974.23,4794.2 4982.09,4786.35 5167.52,4786.35 5175.37,4794.2 5249.37,4794.2 5311.02,4732.55 5311.02,4334.46 P?.10@5234.24,4257.68
Netmk20_5: mk20.5 USB0_DP.2 | length 167.1
  Top Layer w10: mk20.5 4264.65,4688.57 4264.65,4663.42 4297.77,4630.3 4302.34,4630.3 4326.77,4605.87 USB0_DP.2
Netmk20_6: mk20.6 USB0_DMR?.2 | length 205
  Top Layer w10: mk20.6 4284.34,4688.57 4284.34,4660.7 4299.37,4645.67 4326.77,4645.67 4348.97,4623.47 4348.97,4615.99 USB0_DMR?.2
Netmk20_9: mk20.9 P?.2@3973.04,4506.3 | length 985.8
  Top Layer w10: P?.2@3972.44,4506.3 3972.44,4554.64 3935.91,4591.17 3935.91,4621.43 3957.31,4642.83 3988.17,4642.83 3995.18,4635.81 4005.12,4635.81 4022.64,4618.3 4143.37,4618.3 4160.39,4635.32 4197.88,4635.32 4201.98,4639.42 4254.28,4639.42 4275.4,4618.3 4297.37,4618.3 4304.4,4611.27 4304.4,4585.95 4292.21,4573.76 4292.21,4545.13 4312.46,4524.89 4419.83,4524.89 4440.07,4545.13 4440.07,4573.76 4407.54,4606.3 4375.63,4606.3 4375.63,4613.98 4347.49,4642.12 4347.49,4659.32 4343.39,4663.42 4343.39,4688.57 mk20.9
Netmk20_11: mk20.11 P?.14@5234.24,3857.68 | length 2261.7
  Top Layer w10: mk20.11 4375.98,4731.78 4343.44,4731.78 4324.7,4750.53 4324.7,4777.04 4343.44,4795.78 4363.13,4795.78 4382.89,4815.54 4409.24,4815.54 4488.07,4736.72 4558.93,4736.72 4595.74,4699.9 4605.68,4699.9 4659.99,4754.2 4724.46,4754.2 4776.46,4806.2 4979.2,4806.2 4987.06,4798.35 5162.55,4798.35 5170.4,4806.2 5254.34,4806.2 5323.02,4737.52 5323.02,4294.8 5249.37,4221.15 5232.4,4221.15 5161.71,4150.46 5161.71,4027.64 5204.2,3985.15 5208.28,3985.15 5209.17,3984.26 5197.71,3972.81 5197.71,3894.2 P?.14@5234.24,3857.68
Netmk20_12: mk20.12 P?.1@5234.24,5157.68 | length 1325.1
  Top Layer w10: mk20.12 4395.67,4783.07 4376.38,4763.78 v1(4356.7,4763.78) 4396.06,4803.15 4395.67,4803.54
  Bottom Layer w10: v1(4356.7,4763.78) 4763.78,4763.78 4928.63,4928.63 4960.5,4928.63 4979.24,4947.38 4979.24,4973.88 4978.36,4974.77 4978.36,4975.86 4984.27,4981.78 4984.27,5072.07 4978.36,5077.98 4978.36,5079.5 4997.78,5098.92 5037.64,5098.92 5071.94,5133.22 5071.94,5150.19 5079.43,5157.68 P?.1@5234.24,5157.68
Netmk20_17: mk20.17 VREFOUTC?.1 | length 1032.6
  Top Layer w10: v1(4474.8,4842.52) 4483.78,4842.52 4516.64,4809.66 4516.64,4784.5 4520.74,4780.4 4545.9,4780.4 mk20.17
  Bottom Layer w10: v1(4474.8,4842.52) 4447.75,4815.46 4413.03,4815.46 4401.03,4827.46 4341.18,4827.46 4300.7,4786.98 4300.7,4740.59 4333.5,4707.78 4379.89,4707.78 4391.89,4719.78 4556.99,4719.78 VREFOUTC?.1
Netmk20_18: mk20.18 P?.15 | length 2182.9
  Top Layer w10: mk20.18 4583.26,4793.31 4591.52,4785.05 4591.52,4758.38 4602.38,4747.51 4645.07,4790.2 4709.55,4790.2 4765.69,4846.35 4989.97,4846.35 5001.97,4834.35 5147.63,4834.35 5158.76,4845.48 5158.76,4862.45 5190.52,4894.2 5249.37,4894.2 5347.02,4796.55 5347.02,4218.8 5249.37,4121.15 5212.12,4121.15 5173.71,4082.75 5173.71,4032.61 5209.17,3997.15 5267.85,3997.15 5283.65,3981.35 5283.65,3807.09 P?.15
Netmk20_22: mk20.22 MK.8 | length 348.1
  Top Layer w10: mk20.22 4557.9,4866.83 4557.9,4865.27 4584.61,4865.27 4588.71,4861.17 4588.71,4843.56 4587.68,4842.52 4588.71,4841.48 4588.71,4804.83 4603.52,4790.02 4603.52,4765.62 4640.1,4802.2 4701.87,4802.2 4743.71,4844.04 4743.71,4866.53 MK.8
Netmk20_24: mk20.24 MK.9 | length 536.9
  Top Layer w10: v1(4474.8,4960.63) 4524.02,4911.42 mk20.24 ; MK.9 4819.29,4891.73 v1(4829.13,4881.89)
  Bottom Layer w10: v1(4474.8,4960.63) 4503.09,4960.63 4515.09,4948.63 4762.39,4948.63 v1(4829.13,4881.89)
Netmk20_25: mk20.25 MK.7 | length 330.9
  Top Layer w10: mk20.25 4559.46,4924.32 4584.61,4924.32 4588.71,4920.22 4588.71,4902.61 4587.68,4901.57 4588.71,4900.54 4588.71,4886.09 4600.71,4874.09 4600.71,4809.8 4615.52,4794.99 4615.92,4794.99 4635.13,4814.2 4696.9,4814.2 4723.54,4840.84 4723.54,4860.24 MK.7
Netmk20_26: mk20.26 P?.3@5234.24,4957.68 | length 831.6
  Top Layer w10: mk20.26 4559.46,4957.57 4584.72,4957.57 4584.72,4957.68 4636.71,5009.67 4636.71,5068.08 4657.63,5089 4736.68,5089 4786.76,5038.92 4946.61,5038.92 4982.47,5003.06 5178.88,5003.06 5183.87,5008.05 P?.3@5234.24,4957.68
Netmk20_27: mk20.27 P?.12@5234.24,4057.68 | length 1923.9
  Top Layer w10: mk20.27 4559.46,4977.25 4584.61,4977.25 4624.71,5017.35 4624.71,5073.05 4652.66,5101 4741.65,5101 4791.73,5050.92 4951.58,5050.92 4987.44,5015.06 5173.91,5015.06 5197.91,5039.06 5201.2,5039.06 5219.11,5021.15 5258.99,5021.15 5383.02,4897.12 5383.02,4203.89 5236.81,4057.68 P?.12@5234.24,4057.68
Netmk20_32: mk20.32 Y?.2 | length 531.4
  Top Layer w10: mk20.32 4552.68,5072.25 4590.61,5110.19 4593.97,5110.19 4632.77,5149 4761.54,5149 4799.61,5110.92 4842.91,5110.92 4860.79,5128.8 4876.56,5128.8 4877.16,5128.2 4906.44,5157.48 Y?.2
Netmk20_33: mk20.33 Y?.1 | length 416.4
  Top Layer w10: mk20.33 4563.46,5236.22 4742.52,5236.22 Y?.1
Netmk20_34: mk20.34 MK.4 MK.13 P?.1@3893.7,4194.49 | length 5256.1
  Top Layer w10: mk20.34 4454.72,5098.82 v1(4474.8,5078.74) ; MK.4 4665.74,4898.03 4643.26,4898.03 4612.71,4928.57 4612.71,4930.16 4601.99,4940.89 4608.72,4947.63 4608.72,4947.74 4660.71,4999.73 4660.71,5054.41 4671.29,5065 4726.74,5065 4776.82,5014.92 4776.82,4997.95 ; MK.13 4761.15,4982.28 4776.82,4997.95 ; v1(4940.27,5000) 4940.27,4979.64 4921.26,4960.63 4904.52,4977.37 4895.14,4968 4868.64,4968 4854.35,4982.28 4789.69,4982.28 4776.82,4995.16 4776.82,4997.95
  Bottom Layer w10: P?.1@3893.7,4194.49 3935.65,4194.49 4081.58,4048.56 4092.95,4048.56 4111.7,4029.82 4148.15,4029.82 4173.92,4055.59 4173.92,4138.5 4260.31,4224.89 4341.09,4224.89 4370.95,4254.76 4370.95,4286.36 4494.04,4409.45 4684.39,4409.45 4793.75,4300.09 4820.39,4300.09 4829.13,4291.34 4666.84,4129.05 4666.84,4008.91 4638.94,3981.01 4614.06,3981.01 4588.28,3955.23 4588.28,3918.78 4614.06,3893.01 4680.59,3893.01 4809.33,4021.75 4809.33,4052.83 4785.33,4076.83 4785.33,4112.14 4810.3,4137.11 4846.68,4137.11 4894.57,4185 4894.57,4222.53 4927.27,4255.22 4950.5,4255.22 5216.42,4521.15 5249.37,4521.15 5282.77,4554.55 5282.77,5195.07 5271.64,5206.2 5192.82,5206.2 5171.46,5184.85 5066.74,5184.85 5047.94,5166.06 5047.94,5143.17 5027.7,5122.92 4987.84,5122.92 4940.27,5075.35 v1(4940.27,5000) 4919.91,5000 4913.89,4993.98 4913.89,5013.25 4895.14,5032 4875.87,5032 4774.39,5133.48 4537.71,5133.48 4482.97,5078.74 v1(4474.8,5078.74)
Netmk20_35: mk20.35 P?.11@4884.25,5354.33 | length 549.8
  Top Layer w10: mk20.35 4441.82,5153.94 4441.82,5179.1 4445.92,5183.2 4468.36,5183.2 4590.96,5305.8 4787.38,5305.8 4835.91,5354.33 P?.11@4884.25,5354.33
Netmk20_36: mk20.36 P?.10@4784.25,5354.33 | length 469.4
  Top Layer w10: mk20.36 4422.13,5153.94 4422.13,5179.1 4438.23,5195.2 4463.39,5195.2 4585.99,5317.8 4699.38,5317.8 4735.91,5354.33 P?.10@4784.25,5354.33
Netmk20_37: mk20.37 P?.8@4584.25,5354.33 | length 322.7
  Top Layer w10: mk20.37 4402.45,5153.94 4402.45,5179.1 4405.96,5182.61 4405.96,5192.56 4405.51,5193.01 4405.51,5236.22 4468.71,5236.22 4584.25,5351.76 P?.8@4584.25,5354.33
Netmk20_38: mk20.38 P?.9@4684.25,5354.33 | length 494
  Top Layer w10: mk20.38 4382.76,5153.94 4382.76,5179.1 4386.86,5183.2 4388.68,5183.2 4393.51,5188.04 4393.51,5241.19 4400.54,5248.22 4463.74,5248.22 4544.78,5329.26 4544.78,5369.8 4565.83,5390.86 4599.38,5390.86 4635.91,5354.33 P?.9@4684.25,5354.33
Netmk20_41: mk20.41 P?.4@5234.24,4857.68 | length 1317
  Top Layer w10: mk20.41 4316.93,4899.25 4374.79,4841.39 4386.12,4852.72 4406,4852.72 4498.01,4760.72 4572.2,4760.72 4602.38,4730.54 4650.04,4778.2 4714.52,4778.2 4770.67,4834.35 4985,4834.35 4997,4822.35 5152.6,4822.35 5170.76,4840.51 5170.76,4857.48 5170.96,4857.68 P?.4@5234.24,4857.68
Netmk20_42: mk20.42 P?.11@5234.24,4157.68 | length 2093.6
  Top Layer w10: mk20.42 4297.24,4901.97 4374.79,4824.42 4391.09,4840.72 4401.03,4840.72 4493.04,4748.72 4563.9,4748.72 4600.71,4711.9 4655.02,4766.2 4719.49,4766.2 4771.49,4818.2 4984.17,4818.2 4992.03,4810.35 5157.57,4810.35 5165.43,4818.2 5259.31,4818.2 5335.02,4742.49 5335.02,4289.83 5254.34,4209.15 5237.37,4209.15 5234.24,4206.02 P?.11@5234.24,4157.68
Netmk20_43: mk20.43 P?.12@4984.25,5354.33 | length 889.7
  Top Layer w10: mk20.43 4284.34,5153.94 4284.34,5179.1 4288.44,5183.2 4318.81,5183.2 4381.51,5245.91 4381.51,5246.16 4395.57,5260.22 4458.77,5260.22 4532.78,5334.23 4532.78,5374.43 4526.46,5380.75 4526.46,5390.86 4548.86,5390.86 4560.86,5402.86 4604.35,5402.86 4616.35,5390.86 4899.38,5390.86 4935.91,5354.33 P?.12@4984.25,5354.33
Netmk20_44: mk20.44 P?.5@4284.25,5354.33 | length 218.1
  Top Layer w10: mk20.44 4264.65,5153.94 4264.65,5179.1 4284.25,5198.7 P?.5@4284.25,5354.33
Netmk20_45: mk20.45 P?.4@4184.25,5354.33 | length 229.5
  Top Layer w10: P?.4@4184.25,5354.33 4231.41,5307.17 4231.41,5153.94 mk20.45
Netmk20_53: mk20.53 P?.8@5234.24,4457.68 | length 2860.3
  Top Layer w10: mk20.53 4100.87,4983.38 4136.9,4983.38 4136.9,4976.56 4186.86,4926.61 4186.86,4740.89 4177.36,4731.39 4170.33,4731.39 4163.35,4724.41 4006.59,4724.41 3988.17,4742.83 3957.31,4742.83 3911.91,4697.43 3911.91,4648.34 3899.91,4636.34 3899.91,4409.87 3979.08,4330.71 4197.12,4330.71 4251.4,4384.99 4251.4,4399.51 4263.4,4411.51 4263.4,4441.79 4286.5,4464.89 4444.68,4464.89 4464.61,4484.82 4551.44,4484.82 4554.81,4488.19 4554.81,4544.67 4566.81,4556.67 4566.81,4610.12 4674.9,4718.2 5259.31,4718.2 5294.77,4682.75 5294.77,4549.58 5254.34,4509.15 5237.37,4509.15 5234.24,4506.02 P?.8@5234.24,4457.68
Netmk20_54: mk20.54 P?.9@5234.24,4357.68 | length 2955.2
  Top Layer w10: mk20.54 4107.65,4963.69 4132.8,4963.69 4174.86,4921.64 4174.86,4752.89 4158.69,4736.72 4011.25,4736.72 3993.14,4754.83 3952.34,4754.83 3899.91,4702.4 3899.91,4653.31 3887.91,4641.31 3887.91,4404.9 3977.48,4315.34 4198.72,4315.34 4237.88,4354.5 ; 4239.55,4356.16 4263.4,4380.02 4263.4,4394.54 4275.4,4406.54 4275.4,4436.82 4291.47,4452.89 4449.65,4452.89 4469.58,4472.82 4566.81,4472.82 4566.81,4539.7 4578.81,4551.7 4578.81,4602.51 4682.5,4706.2 5254.34,4706.2 5282.77,4677.78 5282.77,4554.55 5249.37,4521.15 5232.4,4521.15 5197.71,4486.46 5197.71,4442.55 5234.24,4406.02 P?.9@5234.24,4357.68
Netmk20_55: mk20.55 P?.7@5234.24,4557.68 | length 2693.5
  Top Layer w10: mk20.55 4100.87,4944.01 4132.8,4944.01 4162.86,4913.95 4162.86,4757.86 4154.23,4749.23 4138.29,4749.23 4137.77,4748.72 4016.22,4748.72 3998.11,4766.83 3947.37,4766.83 3887.91,4707.37 3887.91,4658.28 3875.91,4646.28 3875.91,4399.93 3972.51,4303.34 4203.69,4303.34 4275.4,4375.05 4275.4,4389.57 4287.4,4401.57 4287.4,4431.85 4296.44,4440.89 4454.62,4440.89 4474.55,4460.82 4574.99,4460.82 4578.81,4464.64 4578.81,4534.73 4590.81,4546.73 4590.81,4597.54 4687.47,4694.2 5249.37,4694.2 5270.77,4672.81 5270.77,4642.55 5234.24,4606.02 P?.7@5234.24,4557.68
Netmk20_56: mk20.56 P?.6@5234.24,4657.68 | length 2521.6
  Top Layer w10: mk20.56 4100.87,4924.32 4132.8,4924.32 4150.86,4906.27 4150.86,4778.77 4132.8,4760.72 4068.93,4760.72 4064.83,4764.82 4064.83,4767.53 4057.38,4767.53 4056.67,4766.83 4015.08,4766.83 4003.08,4778.83 3942.4,4778.83 3875.91,4712.34 3875.91,4663.25 3863.91,4651.25 3863.91,4394.96 3967.54,4291.34 4208.66,4291.34 4287.4,4370.08 4287.4,4384.6 4299.4,4396.6 4299.4,4426.88 4301.41,4428.89 4459.59,4428.89 4479.52,4448.82 4590.81,4448.82 4590.81,4529.76 4602.81,4541.76 4602.81,4592.57 4691.45,4681.21 5142.66,4681.21 5166.2,4657.68 P?.6@5234.24,4657.68
Netmk20_58: mk20.58 P?.13@5084.25,5354.33 | length 4478.8
  Top Layer w10: mk20.58@4099.96,4892.64 mk20.58 4097.03,4887.9 3984.19,4887.9 3950.73,4921.36 3915.42,4921.36 3881.95,4887.9 3706.67,4887.9 3678.24,4859.47 3678.24,4819.27 3690.24,4807.27 3690.24,4524.24 3726.59,4487.9 3746.87,4487.9 3811.3,4423.47 3811.3,4172.24 3757.79,4118.73 3757.79,4102.84 3711.64,4102.84 3690.24,4124.24 3690.24,4173.33 3606.24,4257.33 3606.24,5289.29 3803.81,5486.86 5171.26,5486.86 5192.35,5465.77 5192.35,5435.95 5124.78,5368.37 5104.9,5368.37 5094.41,5378.86 5074.09,5378.86 5066.91,5371.67 P?.13@5084.25,5354.33
Netmk20_62: mk20.62 P?.7@4484.25,5354.33 | length 1830.7
  Top Layer w10: v1(3805.51,4685.04) 3805.51,4795.65 3845.01,4835.15 3871.52,4835.15 3891.85,4814.83 4071.16,4814.83 4073,4812.99 mk20.62 mk20.62@4099.51,4811.63
  Bottom Layer w10: 3805.51,4724.41 v1(3805.51,4685.04) 3800.88,4689.67 3800.88,5192.22 3857.17,5248.51 3857.17,5251.35 3911.63,5305.8 3921.65,5305.8 3933.65,5317.8 3999.38,5317.8 4047.72,5366.15 4047.72,5369.46 4069.12,5390.86 4099.38,5390.86 4147.72,5342.52 4147.72,5339.2 4169.12,5317.8 4199.38,5317.8 4247.72,5366.15 4247.72,5369.46 4269.12,5390.86 4399.38,5390.86 4435.91,5354.33 P?.7@4484.25,5354.33
Netmk20_63: mk20.63 P?.6@4384.25,5354.33 | length 1394.1
  Top Layer w10: v1(3858.27,4803.15) 3858.27,4773.66 3868.15,4763.78 3907.2,4802.83 4013.02,4802.83 4025.02,4790.83 4046.73,4790.83 4058.73,4802.83 4066.19,4802.83 4068.93,4800.09 4071.21,4800.09 4076.83,4794.47 4076.83,4793.31 mk20.63
  Bottom Layer w10: v1(3858.27,4803.15) 3884.25,4803.15 3929.22,4848.12 3945.75,4848.12 3963.69,4866.06 3963.69,5163.33 3933.17,5193.85 3933.17,5278.59 3951.33,5296.75 4374.12,5296.75 4384.25,5286.62 P?.6@4384.25,5354.33
NetMK_10: MK.10 P?.5@3893.7,3794.49 S?.2 | length 2388.2
  Top Layer w10: MK.10 4791.4,4911.42 4802.28,4922.3 4802.28,4932.2 4820.58,4913.89 4842.39,4913.89 4874.39,4881.89 4971.4,4881.89 5006.94,4846.35 5142.66,4846.35 5146.76,4850.45 5146.76,4867.42 5185.55,4906.2 5254.34,4906.2 5359.02,4801.52 5359.02,4213.83 5251.4,4106.2 5214.14,4106.2 5185.71,4077.78 5185.71,4037.58 5214.14,4009.15 5272.82,4009.15 5295.65,3986.32 5295.65,3802.12 5268.56,3775.02 5270.77,3772.81 5270.77,3742.55 5249.37,3721.15 5122.16,3721.15 5122.16,3801.68 5078.74,3801.68 S?.2
NetP?_2: P?.2@3893.7,4094.49 VDDD?.1
pads on no net: J?. LP.3 mk20.8 mk20.19 mk20.20 MK.2 MK.3 MK.5 MK.11 MK.12 MK.14 MK.15 MK.16 MK.17
copper on no net: | length 4770.1
  Top Layer w10: 3799.3,4209.33 3799.3,4418.5 3741.9,4475.9 3711.64,4475.9 3678.24,4442.5 3678.24,4319.27 3721.62,4275.9 3741.9,4275.9 3763.3,4254.5 3763.3,4224.24 3741.9,4202.84 3711.64,4202.84 3642.24,4272.24 3642.24,4796.12 3654.24,4808.12 3654.24,4994.93 3642.24,5006.93 3642.24,5274.38 3706.82,5338.96 3790.14,5338.96 3823.72,5372.54 3823.72,5396.7 3877.88,5450.86 5156.35,5450.86 5120.35,5414.86 5059.18,5414.86 5023.72,5379.4 5023.72,5329.26 5025.98,5327 5025.98,5257.06 4981.47,5257.06 4865.21,5140.8 4855.82,5140.8 4837.94,5122.92 4804.58,5122.92 4786.7,5140.8 4786.7,5157.48 4783.19,5161 4627.8,5161 4589,5122.19 4585.64,5122.19 4576.05,5112.6 4574.38,5110.92 4499.98,5110.92 4499.98,5110.81 4506.8,5103.98 4506.8,5065.15 4504.64,5062.99 4504.64,5035.44 4506.8,5033.28 4506.8,5032 4467.43,4992.63 4461.55,4992.63 4449.23,4980.31 4343.39,5086.15 ; 4503.94,3845.47 4514.65,3856.19 4514.65,3902.45 4523.62,3911.42 ; 4659.45,4931.1 4710.63,4931.1 4720.47,4921.26

## Silkscreen, mask and mechanical layers (free items; w line width, h text height)
Mechanical 1:
  the board outline again, w10

## Text inside footprints (layer, text, board x,y; h text height)
J?: Mechanical 15 "PCB Edge" at 4484.25,3651.57 h39.37